# Altium PCB PCB1.PcbDoc
Units mm, origin at the board's own origin, x right, y up, seen from the top; angles counter-clockwise.
Board outline 270.23 x 180.4 mm, 2 copper layers (Top Layer, Bottom Layer); 167 components, 166 nets, 568 pads, 13 vias.
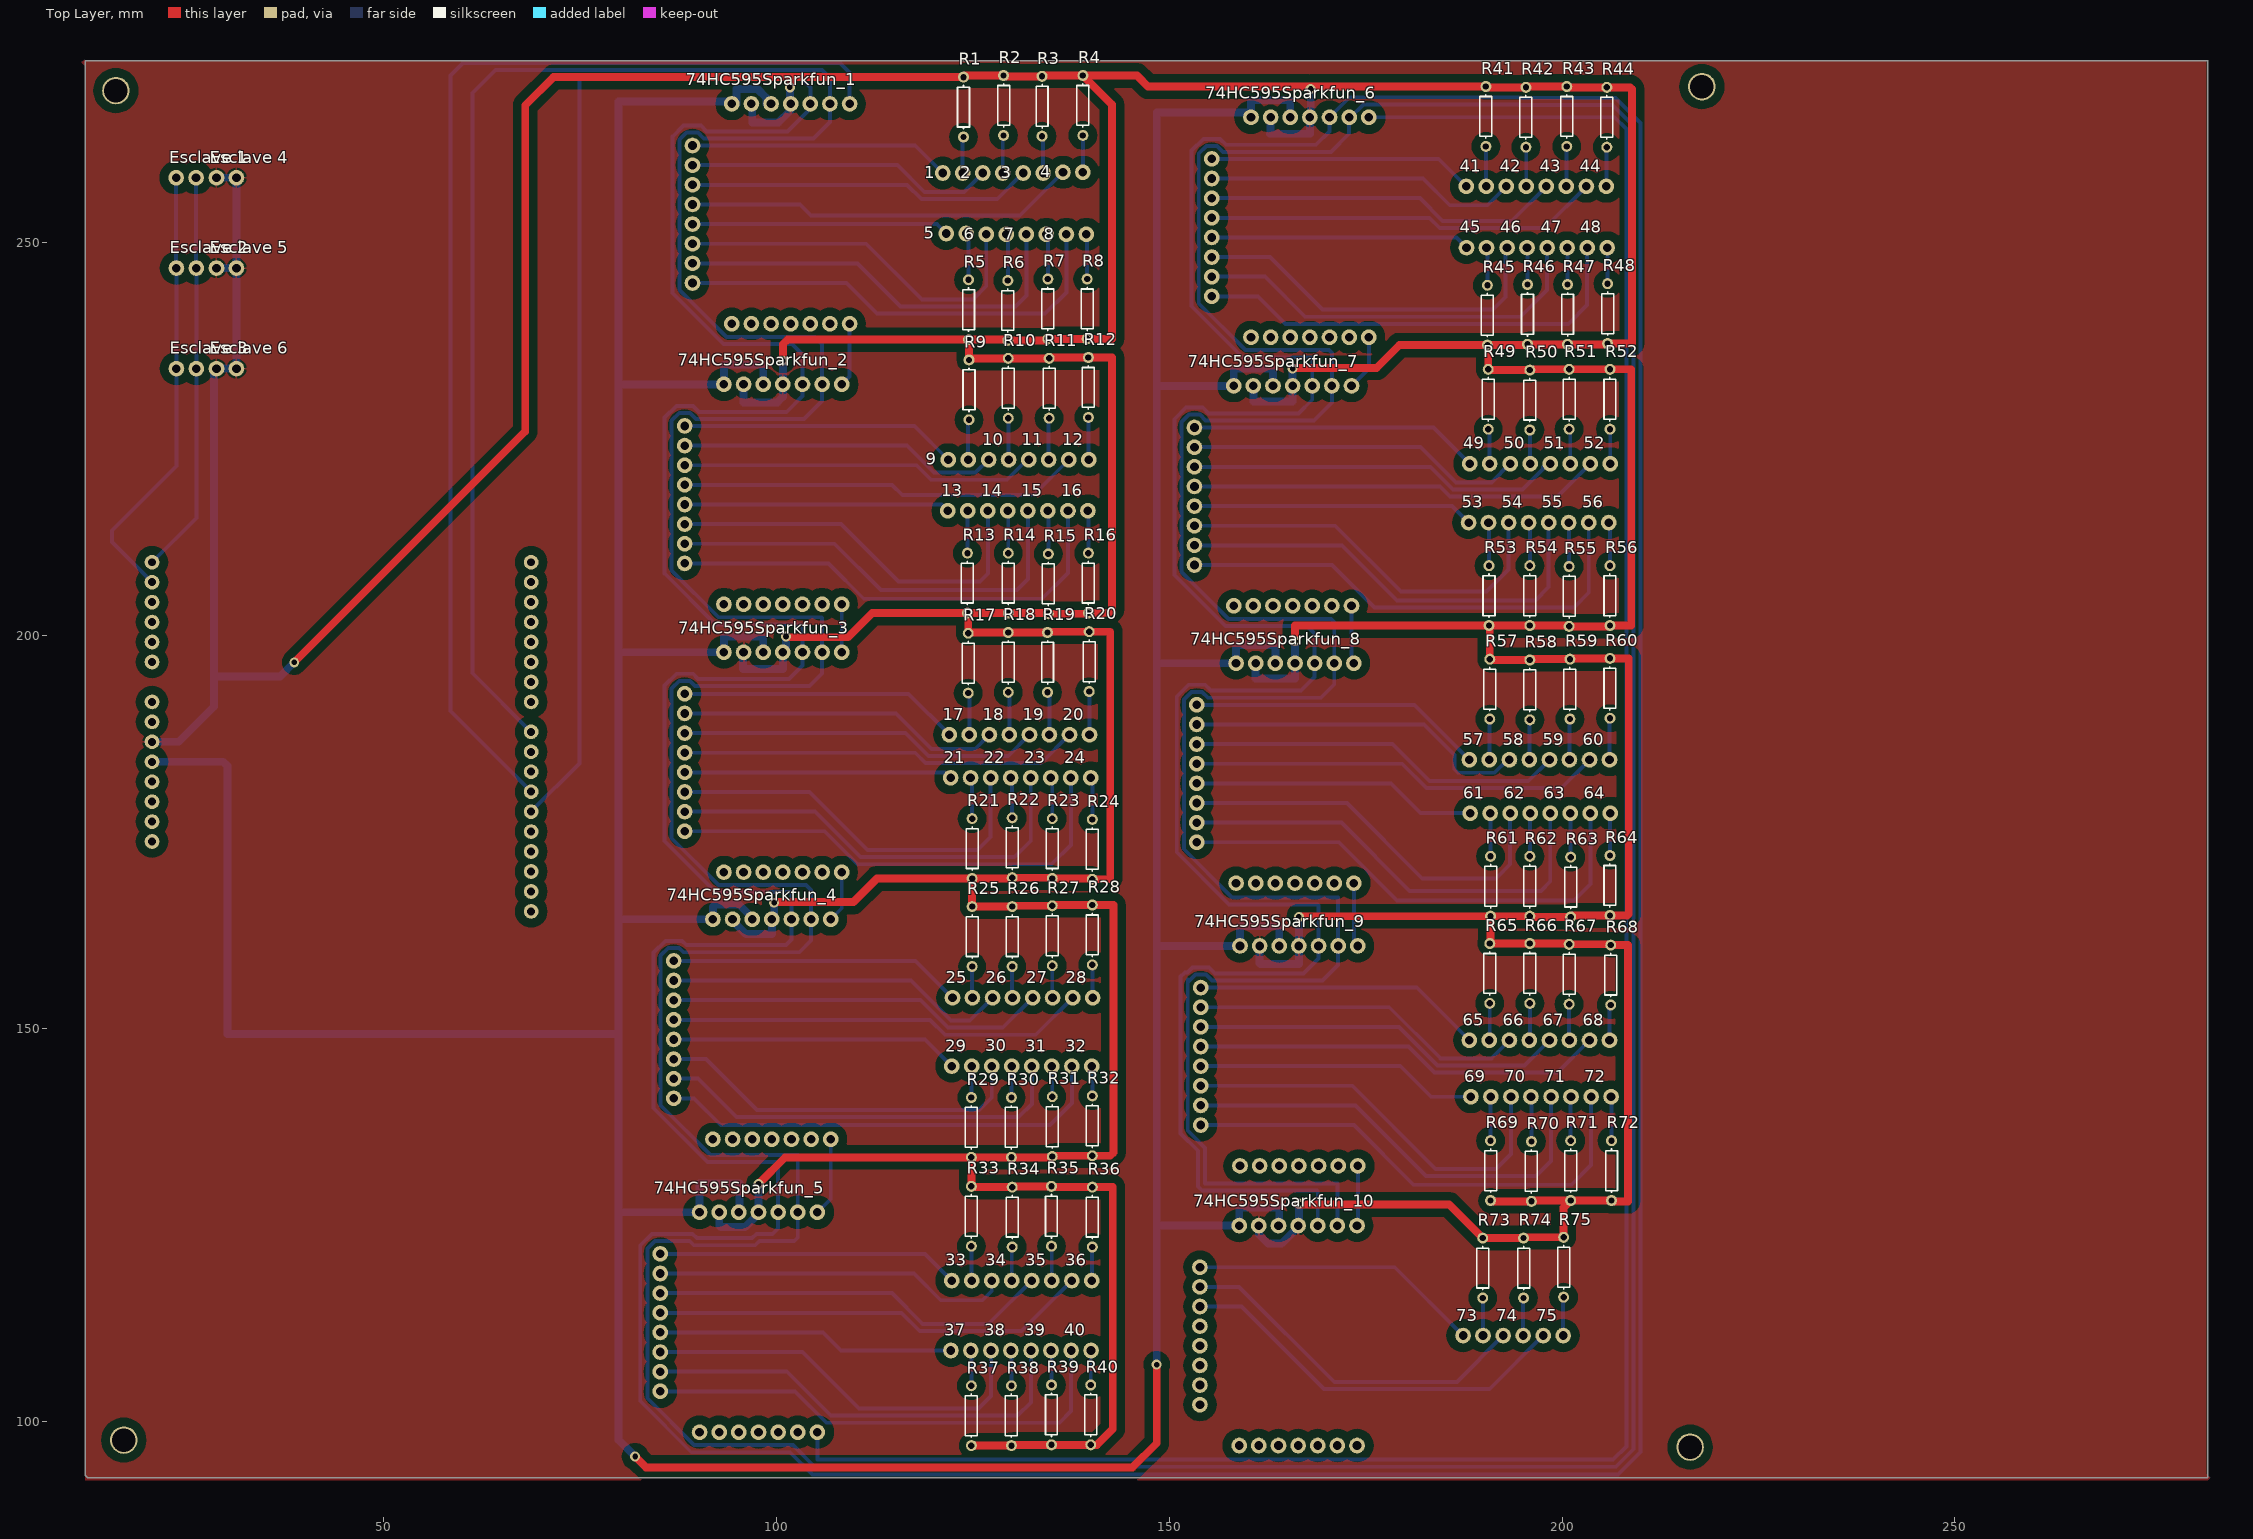
[diagram p0: Top Layer view]
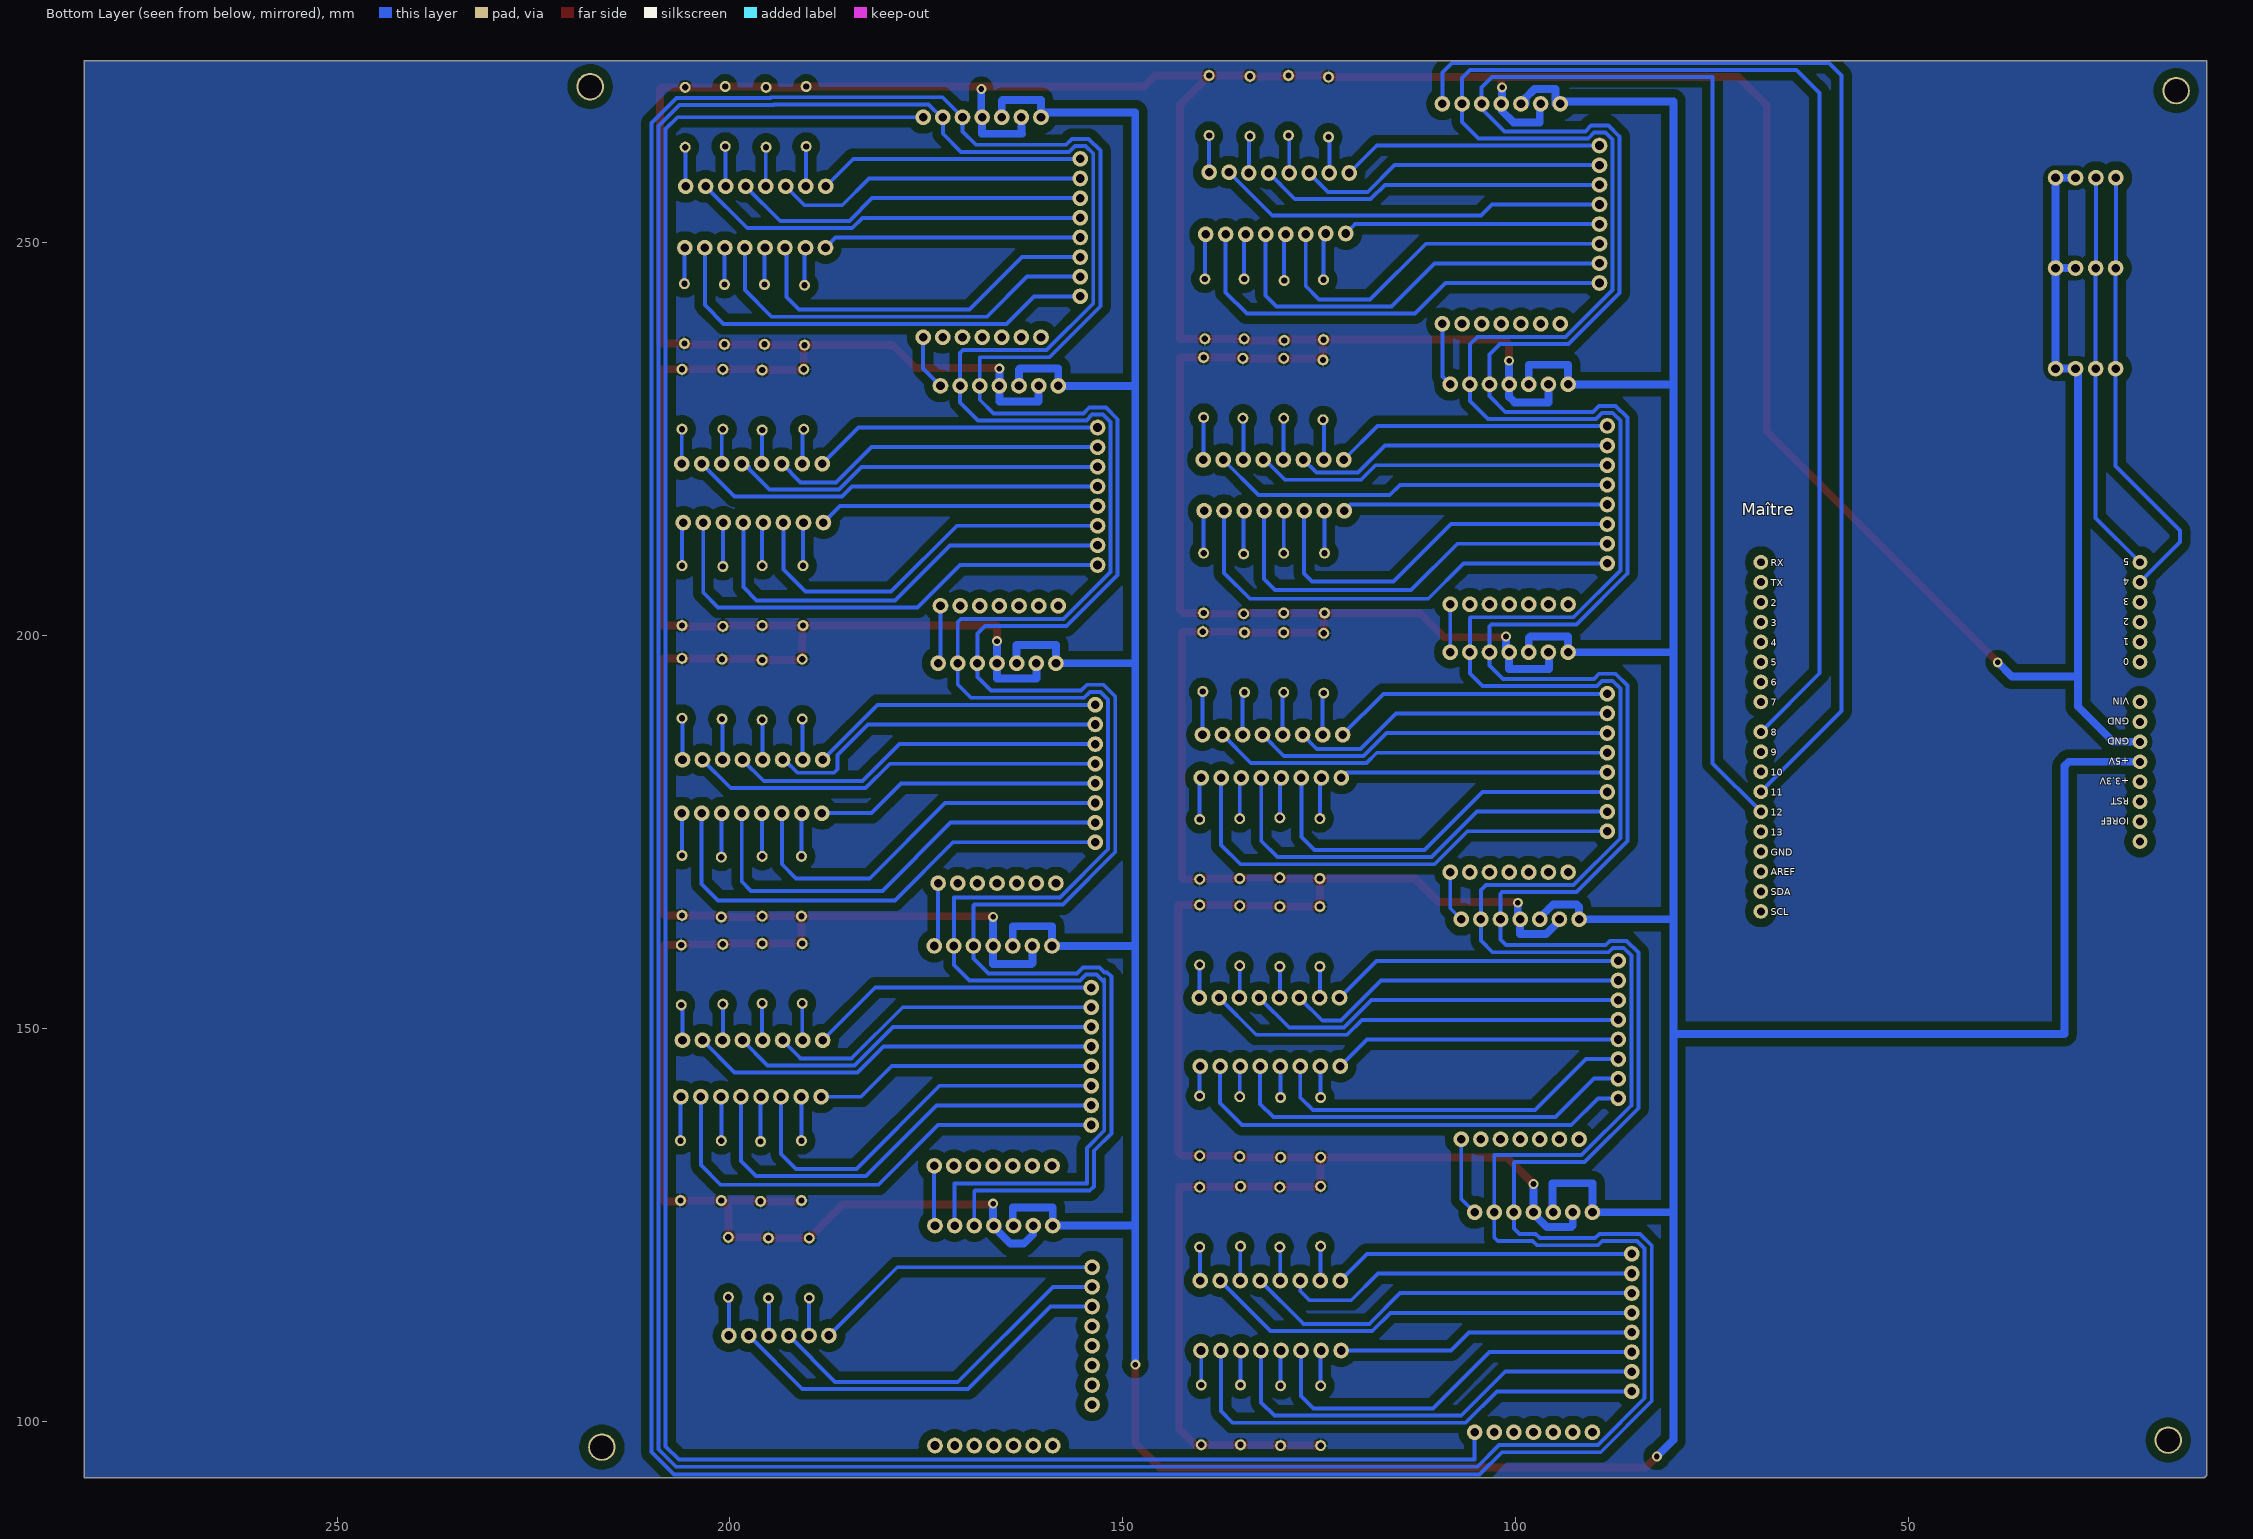
[diagram p1: Bottom Layer view, seen from below]

## Layer stack, top to bottom
Top Solder: solder mask 0.0102, Solder Resist, Dk 3.5
Top Layer: signal copper 0.0356
Dielectric 1: dielectric 0.32, FR-4, Dk 4.8
Bottom Layer: signal copper 0.0356
Bottom Solder: solder mask 0.0102, Solder Resist, Dk 3.5

## Board outline
12.3,92.8 12,93.1 12,273.2 282.2,273.2 282.233,273.167 282.233,92.8

## Design rules (kind name [scope] priority, off if disabled: settings)
Clearance Clearance_plan [(InPoly)] p1: gap=1.1
Clearance [All] p2: gap=0.6
PolygonConnect [All] p1: connectstyle=Relief reliefconductorwidth=0.254 reliefentries=4 polygonreliefangle="90 Angle" airgapwidth=0.254
RoutingVias [All] p1: holewidth=0.8 width=1.7 viastyle="Through Hole" minholewidth=0.8 minwidth=1.7 maxholewidth=0.8 maxwidth=1.7
SolderMaskExpansion [All] p1: expansion=0.102
Width Width_Puissance [(InNet('VCC') OR InNet ('GND'))] p1: maxlimit=2 minlimit=1 preferedwidth=1
Width [All] p2: maxlimit=0.5 minlimit=0.4 preferedwidth=0.5
30 further rules are at their usual default settings.

## Components (designator, comment, footprint, x,y, rotation, side; value= is the part's Value field where it differs from the comment)
1 "Embase_CI_2_contacts" Embase_CI_2_contacts 123.7,258.9 r90 top
2 "Embase_CI_2_contacts" Embase_CI_2_contacts 128.8,258.9 r90 top
3 "Embase_CI_2_contacts" Embase_CI_2_contacts 133.94,258.9 r90 top
4 "Embase_CI_2_contacts" Embase_CI_2_contacts 139,259 r90 top
5 "Embase_CI_2_contacts" Embase_CI_2_contacts 124.14,251.2 r90 top
6 "Embase_CI_2_contacts" Embase_CI_2_contacts 129.24,251.1 r90 top
7 "Embase_CI_2_contacts" Embase_CI_2_contacts 134.34,251.1 r90 top
8 "Embase_CI_2_contacts" Embase_CI_2_contacts 139.44,251.1 r90 top
9 "Embase_CI_2_contacts" Embase_CI_2_contacts 124.4,222.4 r90 top
10 "Embase_CI_2_contacts" Embase_CI_2_contacts 129.54,222.4 r90 top
11 "Embase_CI_2_contacts" Embase_CI_2_contacts 134.64,222.4 r90 top
12 "Embase_CI_2_contacts" Embase_CI_2_contacts 139.74,222.4 r90 top
13 "Embase_CI_2_contacts" Embase_CI_2_contacts 124.34,215.9 r90 top
14 "Embase_CI_2_contacts" Embase_CI_2_contacts 129.44,215.9 r90 top
15 "Embase_CI_2_contacts" Embase_CI_2_contacts 134.54,215.9 r90 top
16 "Embase_CI_2_contacts" Embase_CI_2_contacts 139.64,215.9 r90 top
17 "Embase_CI_2_contacts" Embase_CI_2_contacts 124.54,187.4 r90 top
18 "Embase_CI_2_contacts" Embase_CI_2_contacts 129.64,187.4 r90 top
19 "Embase_CI_2_contacts" Embase_CI_2_contacts 134.74,187.4 r90 top
20 "Embase_CI_2_contacts" Embase_CI_2_contacts 139.84,187.4 r90 top
21 "Embase_CI_2_contacts" Embase_CI_2_contacts 124.7,181.9 r90 top
22 "Embase_CI_2_contacts" Embase_CI_2_contacts 129.8,181.9 r90 top
23 "Embase_CI_2_contacts" Embase_CI_2_contacts 134.9,181.9 r90 top
24 "Embase_CI_2_contacts" Embase_CI_2_contacts 140,181.9 r90 top
25 "Embase_CI_2_contacts" Embase_CI_2_contacts 124.94,153.9 r90 top
26 "Embase_CI_2_contacts" Embase_CI_2_contacts 130.04,153.9 r90 top
27 "Embase_CI_2_contacts" Embase_CI_2_contacts 135.14,153.9 r90 top
28 "Embase_CI_2_contacts" Embase_CI_2_contacts 140.24,153.9 r90 top
29 "Embase_CI_2_contacts" Embase_CI_2_contacts 124.84,145.2 r90 top
30 "Embase_CI_2_contacts" Embase_CI_2_contacts 129.94,145.2 r90 top
31 "Embase_CI_2_contacts" Embase_CI_2_contacts 135.04,145.2 r90 top
32 "Embase_CI_2_contacts" Embase_CI_2_contacts 140.14,145.2 r90 top
33 "Embase_CI_2_contacts" Embase_CI_2_contacts 124.84,117.9 r90 top
34 "Embase_CI_2_contacts" Embase_CI_2_contacts 129.94,117.9 r90 top
35 "Embase_CI_2_contacts" Embase_CI_2_contacts 135.04,117.9 r90 top
36 "Embase_CI_2_contacts" Embase_CI_2_contacts 140.14,117.9 r90 top
37 "Embase_CI_2_contacts" Embase_CI_2_contacts 124.74,109 r90 top
38 "Embase_CI_2_contacts" Embase_CI_2_contacts 129.84,109 r90 top
39 "Embase_CI_2_contacts" Embase_CI_2_contacts 134.94,109 r90 top
40 "Embase_CI_2_contacts" Embase_CI_2_contacts 140.04,109 r90 top
41 "Embase_CI_2_contacts" Embase_CI_2_contacts 190.34,257.2 r90 top
42 "Embase_CI_2_contacts" Embase_CI_2_contacts 195.44,257.2 r90 top
43 "Embase_CI_2_contacts" Embase_CI_2_contacts 200.54,257.2 r90 top
44 "Embase_CI_2_contacts" Embase_CI_2_contacts 205.64,257.2 r90 top
45 "Embase_CI_2_contacts" Embase_CI_2_contacts 190.38,249.4 r90 top
46 "Embase_CI_2_contacts" Embase_CI_2_contacts 195.54,249.4 r90 top
47 "Embase_CI_2_contacts" Embase_CI_2_contacts 200.64,249.4 r90 top
48 "Embase_CI_2_contacts" Embase_CI_2_contacts 205.74,249.4 r90 top
49 "Embase_CI_2_contacts" Embase_CI_2_contacts 190.78,221.9 r90 top
50 "Embase_CI_2_contacts" Embase_CI_2_contacts 195.94,221.9 r90 top
51 "Embase_CI_2_contacts" Embase_CI_2_contacts 201.04,221.9 r90 top
52 "Embase_CI_2_contacts" Embase_CI_2_contacts 206.14,221.9 r90 top
53 "Embase_CI_2_contacts" Embase_CI_2_contacts 190.64,214.4 r90 top
54 "Embase_CI_2_contacts" Embase_CI_2_contacts 195.74,214.4 r90 top
55 "Embase_CI_2_contacts" Embase_CI_2_contacts 200.84,214.4 r90 top
56 "Embase_CI_2_contacts" Embase_CI_2_contacts 205.94,214.4 r90 top
57 "Embase_CI_2_contacts" Embase_CI_2_contacts 190.74,184.2 r90 top
58 "Embase_CI_2_contacts" Embase_CI_2_contacts 195.84,184.2 r90 top
59 "Embase_CI_2_contacts" Embase_CI_2_contacts 200.94,184.2 r90 top
60 "Embase_CI_2_contacts" Embase_CI_2_contacts 206.04,184.2 r90 top
61 "Embase_CI_2_contacts" Embase_CI_2_contacts 190.84,177.4 r90 top
62 "Embase_CI_2_contacts" Embase_CI_2_contacts 195.94,177.4 r90 top
63 "Embase_CI_2_contacts" Embase_CI_2_contacts 201.04,177.4 r90 top
64 "Embase_CI_2_contacts" Embase_CI_2_contacts 206.14,177.4 r90 top
65 "Embase_CI_2_contacts" Embase_CI_2_contacts 190.74,148.5 r90 top
66 "Embase_CI_2_contacts" Embase_CI_2_contacts 195.84,148.5 r90 top
67 "Embase_CI_2_contacts" Embase_CI_2_contacts 200.94,148.5 r90 top
68 "Embase_CI_2_contacts" Embase_CI_2_contacts 206.04,148.5 r90 top
69 "Embase_CI_2_contacts" Embase_CI_2_contacts 190.94,141.3 r90 top
70 "Embase_CI_2_contacts" Embase_CI_2_contacts 196.04,141.3 r90 top
71 "Embase_CI_2_contacts" Embase_CI_2_contacts 201.14,141.3 r90 top
72 "Embase_CI_2_contacts" Embase_CI_2_contacts 206.24,141.3 r90 top
73 "Embase_CI_2_contacts" Embase_CI_2_contacts 189.94,110.9 r90 top
74 "Embase_CI_2_contacts" Embase_CI_2_contacts 195.04,110.9 r90 top
74HC595Sparkfun_1 "74HC595" 74HC595 94.3,267.7 r270 top
74HC595Sparkfun_2 "74HC595" 74HC595 93.3,232 r270 top
74HC595Sparkfun_3 "74HC595" 74HC595 93.3,197.9 r270 top
74HC595Sparkfun_4 "74HC595" 74HC595 91.9,163.9 r270 top
74HC595Sparkfun_5 "74HC595" 74HC595 90.2,126.6 r270 top
74HC595Sparkfun_6 "74HC595" 74HC595 160.4,266 r270 top
74HC595Sparkfun_7 "74HC595" 74HC595 158.2,231.8 r270 top
74HC595Sparkfun_8 "74HC595" 74HC595 158.5,196.5 r270 top
74HC595Sparkfun_9 "74HC595" 74HC595 159,160.5 r270 top
74HC595Sparkfun_10 "74HC595" 74HC595 158.9,124.9 r270 top
75 "Embase_CI_2_contacts" Embase_CI_2_contacts 200.14,110.9 r90 top
"Esclave 1" "Embase_CI_2_contacts" Embase_CI_2_contacts 26.1,258.3 r90 top
"Esclave 2" "Embase_CI_2_contacts" Embase_CI_2_contacts 26.14,246.8 r90 top
"Esclave 3" "Embase_CI_2_contacts" Embase_CI_2_contacts 26.14,234 r90 top
"Esclave 4" "Embase_CI_2_contacts" Embase_CI_2_contacts 31.24,258.3 r90 top
"Esclave 5" "Embase_CI_2_contacts" Embase_CI_2_contacts 31.24,246.8 r90 top
"Esclave 6" "Embase_CI_2_contacts" Embase_CI_2_contacts 31.24,234 r90 top
Maître "Arduino" UNO_R3_SHIELD 71.3,154.74 r180 bottom
R1 "Res1" AXIAL-0.3 123.8,267.3 r270 top
R2 "Res1" AXIAL-0.3 128.9,267.5 r270 top
R3 "Res1" AXIAL-0.3 133.8,267.4 r270 top
R4 "Res1" AXIAL-0.3 139,267.5 r270 top
R5 "Res1" AXIAL-0.3 124.44,241.5 r90 top
R6 "Res1" AXIAL-0.3 129.44,241.4 r90 top
R7 "Res1" AXIAL-0.3 134.54,241.6 r90 top
R8 "Res1" AXIAL-0.3 139.54,241.6 r90 top
R9 "Res1" AXIAL-0.3 124.5,231.3 r270 top
R10 "Res1" AXIAL-0.3 129.5,231.5 r270 top
R11 "Res1" AXIAL-0.3 134.7,231.5 r270 top
R12 "Res1" AXIAL-0.3 139.7,231.6 r270 top
R13 "Res1" AXIAL-0.3 124.3,206.7 r90 top
R14 "Res1" AXIAL-0.3 129.5,206.7 r90 top
R15 "Res1" AXIAL-0.3 134.6,206.6 r90 top
R16 "Res1" AXIAL-0.3 139.7,206.7 r90 top
R17 "Res1" AXIAL-0.3 124.4,196.5 r270 top
R18 "Res1" AXIAL-0.3 129.5,196.6 r270 top
R19 "Res1" AXIAL-0.3 134.5,196.6 r270 top
R20 "Res1" AXIAL-0.3 139.8,196.7 r270 top
R21 "Res1" AXIAL-0.3 124.9,172.9 r90 top
R22 "Res1" AXIAL-0.3 130,173 r90 top
R23 "Res1" AXIAL-0.3 135.1,172.9 r90 top
R24 "Res1" AXIAL-0.3 140.2,172.8 r90 top
R25 "Res1" AXIAL-0.3 124.9,161.7 r270 top
R26 "Res1" AXIAL-0.3 130,161.7 r270 top
R27 "Res1" AXIAL-0.3 135.1,161.8 r270 top
R28 "Res1" AXIAL-0.3 140.2,161.9 r270 top
R29 "Res1" AXIAL-0.3 124.8,137.4 r90 top
R30 "Res1" AXIAL-0.3 129.9,137.4 r90 top
R31 "Res1" AXIAL-0.3 135.1,137.5 r90 top
R32 "Res1" AXIAL-0.3 140.2,137.6 r90 top
R33 "Res1" AXIAL-0.3 124.8,126.09 r270 top
R34 "Res1" AXIAL-0.3 130,125.99 r270 top
R35 "Res1" AXIAL-0.3 135,126.09 r270 top
R36 "Res1" AXIAL-0.3 140.2,125.99 r270 top
R37 "Res1" AXIAL-0.3 124.8,100.7 r90 top
R38 "Res1" AXIAL-0.3 129.9,100.7 r90 top
R39 "Res1" AXIAL-0.3 135,100.8 r90 top
R40 "Res1" AXIAL-0.3 140,100.8 r90 top
R41 "Res1" AXIAL-0.3 190.3,266.1 r270 top
R42 "Res1" AXIAL-0.3 195.4,266 r270 top
R43 "Res1" AXIAL-0.3 200.6,266.1 r270 top
R44 "Res1" AXIAL-0.3 205.7,266 r270 top
R45 "Res1" AXIAL-0.3 190.5,240.8 r90 top
R46 "Res1" AXIAL-0.3 195.6,240.9 r90 top
R47 "Res1" AXIAL-0.3 200.7,240.9 r90 top
R48 "Res1" AXIAL-0.3 205.8,241 r90 top
R49 "Res1" AXIAL-0.3 190.6,230.1 r270 top
R50 "Res1" AXIAL-0.3 195.9,230 r270 top
R51 "Res1" AXIAL-0.3 200.9,230.1 r270 top
R52 "Res1" AXIAL-0.3 206.1,230.1 r270 top
R53 "Res1" AXIAL-0.3 190.7,205.1 r90 top
R54 "Res1" AXIAL-0.3 195.9,205.1 r90 top
R55 "Res1" AXIAL-0.3 200.9,205 r90 top
R56 "Res1" AXIAL-0.3 206.1,205.1 r90 top
R57 "Res1" AXIAL-0.3 190.8,193.2 r270 top
R58 "Res1" AXIAL-0.3 195.9,193.1 r270 top
R59 "Res1" AXIAL-0.3 201,193.2 r270 top
R60 "Res1" AXIAL-0.3 206.1,193.3 r270 top
R61 "Res1" AXIAL-0.3 190.9,168.1 r90 top
R62 "Res1" AXIAL-0.3 195.9,168.1 r90 top
R63 "Res1" AXIAL-0.3 201.1,168 r90 top
R64 "Res1" AXIAL-0.3 206.1,168.2 r90 top
R65 "Res1" AXIAL-0.3 190.8,157 r270 top
R66 "Res1" AXIAL-0.3 195.9,157 r270 top
R67 "Res1" AXIAL-0.3 200.9,156.9 r270 top
R68 "Res1" AXIAL-0.3 206.2,156.8 r270 top
R69 "Res1" AXIAL-0.3 190.9,131.9 r90 top
R70 "Res1" AXIAL-0.3 196.1,131.8 r90 top
R71 "Res1" AXIAL-0.3 201.1,131.9 r90 top
R72 "Res1" AXIAL-0.3 206.3,131.9 r90 top
R73 "Res1" AXIAL-0.3 189.9,119.5 r270 top
R74 "Res1" AXIAL-0.3 195.1,119.5 r270 top
R75 "Res1" AXIAL-0.3 200.2,119.6 r270 top

## Footprints (in the part's own frame and the unit in brackets; to place one, negate y for a bottom-side part, rotate by r counter-clockwise, add the part's x,y. Pads: shape width x height; smd on the part's side, far side on the other; paste and mask are expansions set on the pad)
74HC595 [mm]
  round 2 hole 1.1: 1(0,0) 2(0,2.5) 3(0,5) 4(0,7.5) 5(0,10) 6(0,12.5) 7(0,15) 8(28,0) 9(28,2.5) 10(28,5) 11(28,7.5) 12(28,10) 13(28,12.5) 14(28,15) 15(5.3,-5) 16(7.8,-5) 17(10.3,-5) 18(12.8,-5) 19(15.3,-5) 20(17.8,-5) 21(20.3,-5) 22(22.8,-5)
AXIAL-0.3 [mm] "Axial Device, Thru-Hole; 2 Leads; 0.3 in Pin Spacing"
  round 1.4 hole 0.8: 1(-3.81,0) 2(3.81,0)
  silkscreen extent -2.77,-0.76 2.77,0.76
Embase_CI_2_contacts [mm]
  round 2 hole 1.1: 1(0,0) 2(0,2.54)
UNO_R3_SHIELD [mil]
  round 74 hole 40: 3.3V(2000,1050) 5V(2000,1150) A0(2000,1650) A1(2000,1750) A2(2000,1850) A3(2000,1950) A4(2000,2050) A5(2000,2150) AREF(100,600) D2(100,1950) D3(100,1850) D4(100,1750) D5(100,1650) D6(100,1550) D7(100,1450) D8(100,1300) D9(100,1200) D10(100,1100) D11(100,1000) D12(100,900) D13(100,800) GND@0(2000,1250) GND@1(2000,1350) GND@2(100,700) IOREF(2000,850) NC(2000,750) RES(2000,950) RX(100,2150) SCL(100,400) SDA(100,500) TX(100,2050) VIN(2000,1450)

## Part data
Maître: library part ARDUINO_R3_SHIELD
R1 R2 R3 R4 R5 R6 R7 R8 R9 R10 R11 R12 R13 R14 R15 R16 R17 R18 R19 R20 R21 R22 R23 R24 R25 R26 R27 R28 R29 R30 R31 R32 R33 R34 R35 R36 R37 R38 R39 R40 R41 R42 R43 R44 R45 R46 R47 R48 R49 R50 R51 R52 R53 R54 R55 R56 R57 R58 R59 R60 R61 R62 R63 R64 R65 R66 R67 R68 R69 R70 R71 R72 R73 R74 R75: "Resistor"

## Free pads (board coordinates)
  round 3.5 hole 3: 3(15.9,269.4) 4(16.9,97.6) 5(216.3,96.7) 6(217.8,269.9)

## Via types
v1: diameter 1.27, hole 0.711, Top Layer to Bottom Layer, 13 vias

## Nets (pads, with @x,y where several pads share a name; then routed paths per layer and width w, separated by ;. In a path a pad name is that pad's centre, name@x,y a point inside that pad or via, vN(x,y) a via of type N, cw(c..) or ccw(c..) an arc to the next point about the centre after c; other vN are vias at no path point)
GND: 74HC595Sparkfun_1.2 74HC595Sparkfun_1.4 74HC595Sparkfun_2.2 74HC595Sparkfun_2.4 74HC595Sparkfun_3.2 74HC595Sparkfun_3.4 74HC595Sparkfun_4.2 74HC595Sparkfun_4.4 74HC595Sparkfun_5.2 74HC595Sparkfun_5.4 74HC595Sparkfun_6.2 74HC595Sparkfun_6.4 74HC595Sparkfun_7.2 74HC595Sparkfun_7.4 74HC595Sparkfun_8.2 74HC595Sparkfun_8.4 74HC595Sparkfun_9.2 74HC595Sparkfun_9.4 74HC595Sparkfun_10.2 74HC595Sparkfun_10.4 "Esclave 4.1" "Esclave 4.2" "Esclave 5.1" "Esclave 5.2" "Esclave 6.1" "Esclave 6.2" Maître.GND@0 R1.1 R2.1 R3.1 R4.1 R5.1 R6.1 R7.1 R8.1 R9.1 R10.1 R11.1 R12.1 R13.1 R14.1 R15.1 R16.1 R17.1 R18.1 R19.1 R20.1 R21.1 R22.1 R23.1 R24.1 R25.1 R26.1 R27.1 R28.1 R29.1 R30.1 R31.1 R32.1 R33.1 R34.1 R35.1 R36.1 R37.1 R38.1 R39.1 R40.1 R41.1 R42.1 R43.1 R44.1 R45.1 R46.1 R47.1 R48.1 R49.1 R50.1 R51.1 R52.1 R53.1 R54.1 R55.1 R56.1 R57.1 R58.1 R59.1 R60.1 R61.1 R62.1 R63.1 R64.1 R65.1 R66.1 R67.1 R68.1 R69.1 R70.1 R71.1 R72.1 R73.1 R74.1 R75.1 | length 1269.2
  Top Layer w1: v1(38.6,196.6) 68.01,226.01 68.01,267.52 71.6,271.11 101.8,271.11 ; 74HC595Sparkfun_5.2@92.4,126.3 74HC595Sparkfun_5.2 ; 74HC595Sparkfun_2.2 74HC595Sparkfun_2.2@96,231.8 ; 74HC595Sparkfun_5.4 74HC595Sparkfun_5.4@97.7,126.787 ; v1(97.7,130.2) 101.09,133.59 R29.1 ; 74HC595Sparkfun_4.4 74HC595Sparkfun_4.4@99.4,164.087 ; v1(99.7,166) 99.8,166.1 109.8,166.1 112.79,169.09 R21.1 ; v1(100.8,235) 100.8,237.1 101.39,237.69 R5.1 ; v1(101.2,199.9) 101.3,199.8 109.1,199.8 112.19,202.89 R13.1 ; v1(101.7,269.8) 101.8,269.9 101.8,271.11 ; R37.1 R38.1 130,96.99 R39.1 R40.1 140.79,96.99 142.8,99 142.8,129.8 R36.1 135.1,129.8 R35.1 130.1,129.9 R34.1 124.9,129.8 R33.1 R29.1 ; 74HC595Sparkfun_7.2@160.6,231.7 74HC595Sparkfun_7.2 ; 74HC595Sparkfun_8.2@160.8,196.3 74HC595Sparkfun_8.2 ; 74HC595Sparkfun_6.2@162.6,265.7 74HC595Sparkfun_6.2 ; v1(166,199.3) 166,201.29 R53.1 ; v1@166.1,234.1 176.4,234.1 179.29,236.99 R45.1 ; v1@166.4,127.6 185.61,127.6 R73.1 R74.1 195.2,123.41 R75.1 200.2,127.19 R71.1 ; v1@166.5,164.29 R61.1 ; v1(168,269.6) 167.7,269.9 147.3,269.9 145.89,271.31 R4.1 ; v1@168,269.91 R41.1 190.4,269.81 R42.1 195.5,269.91 R43.1 200.7,269.81 R44.1 208.69,269.81 208.89,269.61 208.89,237.19 R48.1 205.7,237.09 R47.1 R46.1 195.5,236.99 R45.1 ; R69.1 191,127.99 R70.1 196.2,128.09 R71.1 ; 101.8,271.11 R1.1 124,271.31 R2.1 129,271.21 R3.1 133.9,271.31 R4.1 ; R13.1 124.4,202.79 R17.1 124.5,200.41 R18.1 R19.1 134.6,200.51 R20.1 142.49,200.51 142.49,169.19 142.29,168.99 R24.1 140.1,169.09 R23.1 135,169.19 R22.1 129.9,169.09 R21.1 ; R13.1 R14.1 134.5,202.89 R15.1 139.6,202.79 R16.1 142.29,202.89 142.69,203.29 142.69,235.41 R12.1 134.8,235.41 R11.1 R10.1 124.7,235.31 R9.1 124.5,237.63 R5.1 ; R5.1 129.34,237.69 R6.1 134.34,237.59 R7.1 R8.1 142.69,237.79 142.69,267.62 R4.1 ; R29.1 R30.1 135,133.59 R31.1 135.2,133.79 R32.1 142.49,133.79 142.89,134.19 142.89,165.71 R28.1 135.2,165.71 R27.1 130.1,165.61 R26.1 R25.1 R21.1 ; R45.1 190.6,236.89 R49.1 190.7,233.81 R50.1 196,233.91 R51.1 R52.1 208.81,233.91 208.81,201.31 208.79,201.29 R56.1 206,201.19 R55.1 200.8,201.29 R54.1 R53.1 ; R53.1 190.8,201.19 R57.1 190.9,196.91 R58.1 196,197.01 R59.1 201.1,197.11 R60.1 208.49,197.11 208.49,164.59 208.29,164.39 R64.1 201.3,164.39 R63.1 196,164.19 R62.1 R61.1 ; R61.1 190.9,160.91 R65.1 R66.1 200.8,160.81 R67.1 206.1,160.71 R68.1 208.39,160.61 208.39,127.99 206.4,127.99 R72.1 R71.1
  Bottom Layer w1: 20.5,186.49 23.89,186.49 28.4,191 28.4,194.8 ; 28.4,234 28.4,194.8 ; 28.7,234 31.24,234 31.24,246.8 ; 28.7,246.8 31.24,246.8 ; 28.7,258.3 31.24,258.3 31.24,246.8 ; v1(38.6,196.6) 36.8,194.8 28.4,194.8 ; 74HC595Sparkfun_5.2 92.7,124.9 92.9,124.7 95.987,124.7 97.7,126.413 74HC595Sparkfun_5.4 v1(97.7,130.2) ; 74HC595Sparkfun_4.2 94.4,163.713 96.113,162 99.4,162 74HC595Sparkfun_4.4 99.7,164.2 v1(99.7,166) ; 74HC595Sparkfun_3.2 95.75,197.85 95.75,195.75 100.8,195.75 74HC595Sparkfun_3.4 101.2,198.3 v1(101.2,199.9) ; 74HC595Sparkfun_2.2 95.8,229.7 100.1,229.7 100.8,230.4 74HC595Sparkfun_2.4 v1(100.8,235) ; 74HC595Sparkfun_1.2 96.9,267.6 96.9,265.35 100.25,265.35 101.8,266.9 74HC595Sparkfun_1.4 101.7,267.8 v1(101.7,269.8) ; 74HC595Sparkfun_7.2 160.7,229.8 165.7,229.8 74HC595Sparkfun_7.4 v1(165.7,234) ; 74HC595Sparkfun_8.2 160.968,196.468 160.968,194.532 166,194.532 74HC595Sparkfun_8.4 v1(166,199.3) ; 74HC595Sparkfun_10.2 161.4,123.8 162.6,122.6 164.287,122.6 166.4,124.713 74HC595Sparkfun_10.4 166.5,125 v1(166.5,127.7) ; 74HC595Sparkfun_9.2 161.5,158.3 161.6,158.2 166.5,158.2 74HC595Sparkfun_9.4 v1(166.5,164.2) ; 74HC595Sparkfun_6.2 162.9,264 162.8,263.9 167.9,263.9 74HC595Sparkfun_6.4 168,266.1 v1(168,269.6) ; R41.1 R41.1@190.4,269.81 ; R42.1 R42.1@195.5,269.91 ; R43.1 R43.1@200.7,269.81
Net1_1: 1.1 R1.2 | length 4.6
  Top Layer w0.5: R1.2@123.7,263.39 R1.2
  Bottom Layer w0.5: 1.1 R1.2@123.7,263.39
Net1_2: 1.2 74HC595Sparkfun_1.15 | length 33.3
  Bottom Layer w0.5: 74HC595Sparkfun_1.15 117.66,262.4 1.2
Net2_1: 2.1 R2.2 | length 4.8
  Top Layer w0.5: R2.2@128.8,263.59 R2.2
  Bottom Layer w0.5: 2.1 R2.2@128.8,263.59
Net2_2: 2.2 74HC595Sparkfun_1.16 | length 39.4
  Bottom Layer w0.5: 74HC595Sparkfun_1.16 115.4,259.9 118.8,256.5 123.86,256.5 2.2
Net3_1: 3.1 R3.2 | length 4.7
  Top Layer w0.5: R3.2 R3.2@133.94,263.45
  Bottom Layer w0.5: 3.1 R3.2@133.94,263.45
Net3_2: 3.2 74HC595Sparkfun_1.17 | length 44.2
  Bottom Layer w0.5: 74HC595Sparkfun_1.17 116.627,257.4 118.427,255.6 128.1,255.6 3.2
Net4_1: 4.1 R4.2 | length 4.7
  Bottom Layer w0.5: 4.1 R4.2
Net4_2: 4.2 74HC595Sparkfun_1.18 | length 50
  Bottom Layer w0.5: 74HC595Sparkfun_1.18 103,254.9 104.4,253.5 130.96,253.5 4.2
Net5_1: 5.1 R5.2 | length 6
  Top Layer w0.5: 5.1 5.1@124.44,250.9
  Bottom Layer w0.5: R5.2 5.1@124.44,250.9
Net5_2: 5.2 74HC595Sparkfun_1.19 | length 32.8
  Bottom Layer w0.5: 74HC595Sparkfun_1.19 120.4,252.4 5.2
Net6_1: 6.1 R6.2 | length 6
  Top Layer w0.5: 6.1 6.1@129.44,250.9
  Bottom Layer w0.5: R6.2 6.1@129.44,250.9
Net6_2: 6.2 74HC595Sparkfun_1.20 | length 47.6
  Bottom Layer w0.5: 74HC595Sparkfun_1.20 111.4,249.9 118.5,242.8 125,242.8 126.7,244.5 6.2
Net7_1: 7.1 R7.2 | length 5.8
  Top Layer w0.5: 7.1 7.1@134.54,250.9
  Bottom Layer w0.5: R7.2 7.1@134.54,250.9
Net7_2: 7.2 74HC595Sparkfun_1.21 | length 53.2
  Bottom Layer w0.5: 74HC595Sparkfun_1.21 110.3,247.4 115.8,241.9 130.4,241.9 131.8,243.3 7.2
Net8_1: 8.1 R8.2 | length 5.7
  Top Layer w0.5: 8.1 8.1@139.54,251
  Bottom Layer w0.5: R8.2 8.1@139.54,251
Net8_2: 8.2 74HC595Sparkfun_1.22 | length 57.7
  Bottom Layer w0.5: 74HC595Sparkfun_1.22 108.9,244.9 112.8,241 134.2,241 136.9,243.7 8.2
Net9_1: 9.1 R9.2 | length 5.1
  Top Layer w0.5: R9.2@124.4,227.39 R9.2
  Bottom Layer w0.5: 9.1 R9.2@124.4,227.39
Net9_2: 9.2 74HC595Sparkfun_2.15 | length 35.3
  Bottom Layer w0.5: 74HC595Sparkfun_2.15 117.56,226.7 9.2
Net10_1: 10.1 R10.2 | length 5.3
  Top Layer w0.5: R10.2 R10.2@129.54,227.65
  Bottom Layer w0.5: 10.1 R10.2@129.54,227.65
Net10_2: 10.2 74HC595Sparkfun_2.16 | length 40.8
  Bottom Layer w0.5: 74HC595Sparkfun_2.16 116.6,224.2 120.05,220.75 125.35,220.75 10.2
Net11_1: 11.1 R11.2 | length 5.3
  Top Layer w0.5: R11.2@134.64,227.63 R11.2
  Bottom Layer w0.5: 11.1 R11.2@134.64,227.63
Net11_2: 11.2 74HC595Sparkfun_2.17 | length 45.6
  Bottom Layer w0.5: 74HC595Sparkfun_2.17 117.827,221.7 119.677,219.85 129.323,219.85 131.873,222.4 11.2
Net12_1: 12.1 R12.2 | length 5.4
  Top Layer w0.5: R12.2 R12.2@139.74,227.75
  Bottom Layer w0.5: 12.1 R12.2@139.74,227.75
Net12_2: 12.2 74HC595Sparkfun_2.18 | length 51.3
  Bottom Layer w0.5: 74HC595Sparkfun_2.18 114.7,219.2 116,217.9 132.7,217.9 12.2
Net13_1: 13.1 R13.2 | length 5.4
  Top Layer w0.5: 13.1@124.3,215.86 13.1
  Bottom Layer w0.5: R13.2 13.1@124.3,215.86
Net13_2: 13.2 74HC595Sparkfun_2.19 | length 33.8
  Bottom Layer w0.5: 74HC595Sparkfun_2.19 121,216.7 13.2
Net14_1: 14.1 R14.2 | length 5.4
  Top Layer w0.5: 14.1 14.1@129.5,215.84
  Bottom Layer w0.5: R14.2 14.1@129.5,215.84
Net14_2: 14.2 74HC595Sparkfun_2.20 | length 50
  Bottom Layer w0.5: 74HC595Sparkfun_2.20 108.2,214.2 115.5,206.9 125.9,206.9 126.9,207.9 14.2
Net15_1: 15.1 R15.2 | length 5.5
  Top Layer w0.5: 15.1 15.1@134.6,215.84
  Bottom Layer w0.5: R15.2 15.1@134.6,215.84
Net15_2: 15.2 74HC595Sparkfun_2.21 | length 55.4
  Bottom Layer w0.5: 74HC595Sparkfun_2.21 107.4,211.7 113.3,205.8 130.6,205.8 132,207.2 15.2
Net16_1: 16.1 R16.2 | length 5.4
  Top Layer w0.5: 16.1 16.1@139.7,215.84
  Bottom Layer w0.5: R16.2 16.1@139.7,215.84
Net16_2: 16.2 74HC595Sparkfun_2.22 | length 59.9
  Bottom Layer w0.5: 74HC595Sparkfun_2.22 106.6,209.2 111.1,204.7 133.8,204.7 137.1,208 16.2
Net17_1: 17.1 R17.2 | length 5.3
  Top Layer w0.5: R17.2 R17.2@124.54,192.55
  Bottom Layer w0.5: 17.1 R17.2@124.54,192.55
Net17_2: 17.2 74HC595Sparkfun_3.15 | length 35.9
  Bottom Layer w0.5: 74HC595Sparkfun_3.15 116.8,192.6 17.2
Net18_1: 18.1 R18.2 | length 5.4
  Top Layer w0.5: R18.2 R18.2@129.64,192.65
  Bottom Layer w0.5: 18.1 R18.2@129.64,192.65
Net18_2: 18.2 74HC595Sparkfun_3.16 | length 41.4
  Bottom Layer w0.5: 74HC595Sparkfun_3.16 115.2,190.1 119.7,185.6 125.3,185.6 18.2
Net19_1: 19.1 R19.2 | length 5.5
  Top Layer w0.5: R19.2 R19.2@134.74,192.55
  Bottom Layer w0.5: 19.1 R19.2@134.74,192.55
Net19_2: 19.2 74HC595Sparkfun_3.17 | length 46.2
  Bottom Layer w0.5: 74HC595Sparkfun_3.17 116.427,187.6 119.327,184.7 129.5,184.7 19.2
Net20_1: 20.1 R20.2 | length 5.5
  Top Layer w0.5: R20.2@139.6,192.79 R20.2@139.84,192.55
  Bottom Layer w0.5: 20.1 R20.2@139.84,192.55
Net20_2: 20.2 74HC595Sparkfun_3.18 | length 51
  Bottom Layer w0.5: 74HC595Sparkfun_3.18 117.654,185.1 118.954,183.8 133.7,183.8 20.2
Net21_1: 21.1 R21.2 | length 5.3
  Top Layer w0.5: 21.1 21.1@124.9,181.7
  Bottom Layer w0.5: R21.2 21.1@124.9,181.7
Net21_2: 21.2 74HC595Sparkfun_3.19 | length 34.1
  Bottom Layer w0.5: 74HC595Sparkfun_3.19 121.46,182.6 21.2
Net22_1: 22.1 R22.2 | length 5.2
  Top Layer w0.5: 22.1 22.1@130,181.7
  Bottom Layer w0.5: R22.2 22.1@130,181.7
Net22_2: 22.2 74HC595Sparkfun_3.20 | length 50.3
  Bottom Layer w0.5: 74HC595Sparkfun_3.20 104.2,180.1 111.6,172.7 125.6,172.7 127.26,174.36 22.2
Net23_1: 23.1 R23.2 | length 5.3
  Top Layer w0.5: 23.1 23.1@135.1,181.7
  Bottom Layer w0.5: R23.2 23.1@135.1,181.7
Net23_2: 23.2 74HC595Sparkfun_3.21 | length 55.4
  Bottom Layer w0.5: 74HC595Sparkfun_3.21 104.873,177.6 110.673,171.8 130.3,171.8 132.36,173.86 23.2
Net24_1: 24.1 R24.2 | length 5.4
  Top Layer w0.5: 24.1 24.1@140.2,181.7
  Bottom Layer w0.5: R24.2 24.1@140.2,181.7
Net24_2: 24.2 74HC595Sparkfun_3.22 | length 60.5
  Bottom Layer w0.5: 74HC595Sparkfun_3.22 106.1,175.1 110.3,170.9 135,170.9 137.46,173.36 24.2
Net25_1: 25.1 R25.2 | length 4
  Bottom Layer w0.5: R25.2 124.9,153.94 25.1
Net25_2: 25.2 74HC595Sparkfun_4.15 | length 37.4
  Bottom Layer w0.5: 74HC595Sparkfun_4.15 117.7,158.6 25.2
Net26_1: 26.1 R26.2 | length 4
  Bottom Layer w0.5: R26.2 130,153.94 26.1
Net26_2: 26.2 74HC595Sparkfun_4.16 | length 43.9
  Bottom Layer w0.5: 74HC595Sparkfun_4.16 117.1,156.1 122.2,151 124.6,151 26.2
Net27_1: 27.1 R27.2 | length 4.1
  Bottom Layer w0.5: R27.2 135.1,153.94 27.1
Net27_2: 27.2 74HC595Sparkfun_4.17 | length 48.7
  Bottom Layer w0.5: 74HC595Sparkfun_4.17 118.327,153.6 121.827,150.1 128.8,150.1 27.2
Net28_1: 28.1 R28.2 | length 4.2
  Bottom Layer w0.5: R28.2 140.2,153.94 28.1
Net28_2: 28.2 74HC595Sparkfun_4.18 | length 53.5
  Bottom Layer w0.5: 74HC595Sparkfun_4.18 119.554,151.1 121.454,149.2 133,149.2 28.2
Net29_1: 29.1 R29.2 | length 4
  Bottom Layer w0.5: R29.2 124.8,145.16 29.1
Net29_2: 29.2 74HC595Sparkfun_4.19 | length 36.8
  Bottom Layer w0.5: 74HC595Sparkfun_4.19 118.9,148.6 29.2
Net30_1: 30.1 R30.2 | length 4
  Bottom Layer w0.5: R30.2 129.9,145.16 30.1
Net30_2: 30.2 74HC595Sparkfun_4.20 | length 47.9
  Bottom Layer w0.5: 74HC595Sparkfun_4.20 91,146.1 97.5,139.6 125.8,139.6 127.4,141.2 30.2
Net31_1: 31.1 R31.2 | length 3.9
  Bottom Layer w0.5: 31.1 135.1,145.14 R31.2
Net31_2: 31.2 74HC595Sparkfun_4.21 | length 53.1
  Bottom Layer w0.5: 74HC595Sparkfun_4.21 90,143.6 94.9,138.7 130.8,138.7 132.5,140.4 31.2
Net32_1: 32.1 R32.2 | length 3.8
  Bottom Layer w0.5: 32.1 140.2,145.14 R32.2
Net32_2: 32.2 74HC595Sparkfun_4.22 | length 58
  Bottom Layer w0.5: 74HC595Sparkfun_4.22 89.5,141.1 92.9,137.7 134.8,137.7 137.6,140.5 32.2
Net33_1: 33.1 R33.2 | length 4.4
  Bottom Layer w0.5: R33.2 124.84,122.24 33.1
Net33_2: 33.2 74HC595Sparkfun_5.15 | length 38.5
  Bottom Layer w0.5: 74HC595Sparkfun_5.15 118.9,121.3 33.2
Net34_1: 34.1 R34.2 | length 4.3
  Bottom Layer w0.5: 34.1 129.94,122.12 R34.2
Net34_2: 34.2 74HC595Sparkfun_5.16 | length 45.4
  Bottom Layer w0.5: 74HC595Sparkfun_5.16 117.5,118.8 120.9,115.4 126.2,115.4 127.4,116.6 34.2
Net35_1: 35.1 R35.2 | length 4.4
  Bottom Layer w0.5: R35.2 135.04,122.24 35.1
Net35_2: 35.2 74HC595Sparkfun_5.17 | length 51.2
  Bottom Layer w0.5: 74HC595Sparkfun_5.17 114.7,116.3 118.6,112.4 127,112.4 35.2
Net36_1: 36.1 R36.2 | length 4.3
  Bottom Layer w0.5: 36.1 140.14,122.12 R36.2
Net36_2: 36.2 74HC595Sparkfun_5.18 | length 56
  Bottom Layer w0.5: 74HC595Sparkfun_5.18 115.927,113.8 118.227,111.5 131.2,111.5 36.2
Net37_1: 37.1 R37.2 | length 4.5
  Bottom Layer w0.5: 37.1 124.8,108.94 R37.2
Net37_2: 37.2 74HC595Sparkfun_5.19 | length 38
  Bottom Layer w0.5: 74HC595Sparkfun_5.19 105.9,111.3 108.2,109 37.2
Net38_1: 38.1 R38.2 | length 4.5
  Bottom Layer w0.5: 38.1 129.9,108.94 R38.2
Net38_2: 38.2 74HC595Sparkfun_5.20 | length 51.5
  Bottom Layer w0.5: 74HC595Sparkfun_5.20 103.3,108.8 110.5,101.6 125.7,101.6 127.3,103.2 38.2
Net39_1: 39.1 R39.2 | length 4.4
  Bottom Layer w0.5: 39.1 135,108.94 R39.2
Net39_2: 39.2 74HC595Sparkfun_5.21 | length 56.8
  Bottom Layer w0.5: 74HC595Sparkfun_5.21 101.3,106.3 106.9,100.7 130.7,100.7 132.4,102.4 39.2
Net40_1: 40.1 R40.2 | length 4.4
  Bottom Layer w0.5: R40.2 140,108.96 40.1
Net40_2: 40.2 74HC595Sparkfun_5.22 | length 62.3
  Bottom Layer w0.5: 74HC595Sparkfun_5.22 102.333,103.8 106.333,99.8 136,99.8 137.5,101.3 40.2
Net41_1: 41.1 R41.2 | length 5.1
  Bottom Layer w0.5: R41.2 190.34,262.25 41.1
Net41_2: 41.2 74HC595Sparkfun_6.15 | length 33.8
  Bottom Layer w0.5: 74HC595Sparkfun_6.15 184.3,260.7 41.2
Net42_1: 42.1 R42.2 | length 5
  Bottom Layer w0.5: R42.2 195.44,262.15 42.1
Net42_2: 42.2 74HC595Sparkfun_6.16 | length 39.9
  Bottom Layer w0.5: 74HC595Sparkfun_6.16 182.3,258.2 185.7,254.8 190.5,254.8 42.2
Net43_1: 43.1 R43.2 | length 5.1
  Bottom Layer w0.5: 43.1 200.54,262.23 R43.2
Net43_2: 43.2 74HC595Sparkfun_6.17 | length 45.6
  Bottom Layer w0.5: 74HC595Sparkfun_6.17 181.9,255.7 184.8,252.8 193.6,252.8 43.2
Net44_1: 44.1 R44.2 | length 5
  Bottom Layer w0.5: 44.1 205.64,262.13 R44.2
Net44_2: 44.2 74HC595Sparkfun_6.18 | length 50.4
  Bottom Layer w0.5: 74HC595Sparkfun_6.18 183.127,253.2 184.427,251.9 197.8,251.9 44.2
Net45_1: 45.1 R45.2 | length 4.8
  Bottom Layer w0.5: 45.1 190.5,249.28 R45.2
Net45_2: 45.2 74HC595Sparkfun_6.19 | length 33
  Bottom Layer w0.5: 74HC595Sparkfun_6.19 186.54,250.7 45.2
Net46_1: 46.1 R46.2 | length 4.7
  Bottom Layer w0.5: 46.1 195.6,249.34 R46.2
Net46_2: 46.2 74HC595Sparkfun_6.20 | length 47.2
  Bottom Layer w0.5: 74HC595Sparkfun_6.20 162.8,248.2 169.5,241.5 191.2,241.5 192.8,243.1 192.8,249.2 46.2
Net47_1: 47.1 R47.2 | length 4.7
  Bottom Layer w0.5: 47.1 200.7,249.34 R47.2
Net47_2: 47.2 74HC595Sparkfun_6.21 | length 51.6
  Bottom Layer w0.5: 74HC595Sparkfun_6.21 162.2,245.7 167.3,240.6 194.7,240.6 198.1,244 47.2
Net48_1: 48.1 R48.2 | length 4.6
  Bottom Layer w0.5: 48.1 205.8,249.34 R48.2
Net48_2: 48.2 74HC595Sparkfun_6.22 | length 57.5
  Bottom Layer w0.5: 74HC595Sparkfun_6.22 161.3,243.2 164.8,239.7 200.8,239.7 203.2,242.1 48.2
Net49_1: 49.1 R49.2 | length 4.5
  Bottom Layer w0.5: R49.2 190.78,226.11 49.1
Net49_2: 49.2 74HC595Sparkfun_7.15 | length 36.9
  Bottom Layer w0.5: 74HC595Sparkfun_7.15 183.64,226.5 49.2
Net50_1: 50.1 R50.2 | length 4.3
  Bottom Layer w0.5: R50.2 195.94,226.15 50.1
Net50_2: 50.2 74HC595Sparkfun_7.16 | length 43.1
  Bottom Layer w0.5: 74HC595Sparkfun_7.16 182,224 186.5,219.5 191,219.5 50.2
Net51_1: 51.1 R51.2 | length 4.4
  Bottom Layer w0.5: R51.2 201.04,226.15 51.1
Net51_2: 51.2 74HC595Sparkfun_7.17 | length 48
  Bottom Layer w0.5: 74HC595Sparkfun_7.17 183.227,221.5 186.127,218.6 194.973,218.6 197.59,221.217 197.59,221.5 198.1,221.5 51.2
Net52_1: 52.1 R52.2 | length 4.4
  Bottom Layer w0.5: R52.2 206.14,226.25 52.1
Net52_2: 52.2 74HC595Sparkfun_7.18 | length 52.7
  Bottom Layer w0.5: 74HC595Sparkfun_7.18 184.454,219 185.754,217.7 199.4,217.7 52.2
Net53_1: 53.1 R53.2 | length 5.5
  Bottom Layer w0.5: 53.1 190.7,214.34 R53.2
Net53_2: 53.2 74HC595Sparkfun_7.19 | length 35.8
  Bottom Layer w0.5: 74HC595Sparkfun_7.19 186,216.5 53.2
Net54_1: 54.1 R54.2 | length 5.6
  Bottom Layer w0.5: 54.1 195.9,214.24 R54.2
Net54_2: 54.2 74HC595Sparkfun_7.20 | length 50.6
  Bottom Layer w0.5: 74HC595Sparkfun_7.20 171.1,214 179.5,205.6 190.4,205.6 193.2,208.4 54.2
Net55_1: 55.1 R55.2 | length 5.6
  Bottom Layer w0.5: 55.1 200.9,214.34 R55.2
Net55_2: 55.2 74HC595Sparkfun_7.21 | length 56.9
  Bottom Layer w0.5: 74HC595Sparkfun_7.21 172,211.5 179,204.5 196.6,204.5 198.3,206.2 55.2
Net56_1: 56.1 R56.2 | length 5.6
  Bottom Layer w0.5: 56.1 206.1,214.24 R56.2
Net56_2: 56.2 74HC595Sparkfun_7.22 | length 62.1
  Bottom Layer w0.5: 74HC595Sparkfun_7.22 170.7,209 176.1,203.6 201.5,203.6 203.4,205.5 56.2
Net57_1: 57.1 R57.2 | length 5.2
  Bottom Layer w0.5: 57.1 190.74,189.33 R57.2
Net57_2: 57.2 74HC595Sparkfun_8.15 | length 37.6
  Bottom Layer w0.5: 74HC595Sparkfun_8.15 181.2,191.2 57.2
Net58_1: 58.1 R58.2 | length 5.1
  Bottom Layer w0.5: 58.1 195.84,189.23 R58.2
Net58_2: 58.2 74HC595Sparkfun_8.16 | length 44.1
  Bottom Layer w0.5: 74HC595Sparkfun_8.16 182.427,188.7 186.3,184.827 186.3,183 186.75,182.55 191.423,182.55 193.073,184.2 58.2
Net59_1: 59.1 R59.2 | length 5.2
  Bottom Layer w0.5: 59.1 200.94,189.33 R59.2
Net59_2: 59.2 74HC595Sparkfun_8.17 | length 48
  Bottom Layer w0.5: 74HC595Sparkfun_8.17 178.4,186.2 183.1,181.5 195.7,181.5 59.2
Net60_1: 60.1 R60.2 | length 5.3
  Bottom Layer w0.5: 60.1 206.04,189.43 R60.2
Net60_2: 60.2 74HC595Sparkfun_8.18 | length 52.8
  Bottom Layer w0.5: 74HC595Sparkfun_8.18 179.627,183.7 182.727,180.6 199.9,180.6 60.2
Net61_1: 61.1 R61.2 | length 5.5
  Bottom Layer w0.5: 61.1 190.9,177.34 R61.2
Net61_2: 61.2 74HC595Sparkfun_8.19 | length 36.4
  Bottom Layer w0.5: 74HC595Sparkfun_8.19 178.2,181.2 182,177.4 61.2
Net62_1: 62.1 R62.2 | length 5.5
  Bottom Layer w0.5: R62.2 195.9,177.36 62.1
Net62_2: 62.2 74HC595Sparkfun_8.20 | length 51.1
  Bottom Layer w0.5: 74HC595Sparkfun_8.20 172.6,178.7 182.2,169.1 191.6,169.1 193.4,170.9 62.2
Net63_1: 63.1 R63.2 | length 5.6
  Bottom Layer w0.5: 63.1 201.1,177.34 R63.2
Net63_2: 63.2 74HC595Sparkfun_8.21 | length 57.8
  Bottom Layer w0.5: 74HC595Sparkfun_8.21 171.9,176.2 180.6,167.5 197.3,167.5 198.5,168.7 63.2
Net64_1: 64.1 R64.2 | length 5.4
  Bottom Layer w0.5: R64.2 206.1,177.36 64.1
Net64_2: 64.2 74HC595Sparkfun_8.22 | length 63
  Bottom Layer w0.5: 74HC595Sparkfun_8.22 171.6,173.7 179,166.3 201.5,166.3 203.6,168.4 64.2
Net65_1: 65.1 R65.2 | length 4.7
  Bottom Layer w0.5: 65.1 190.8,148.56 R65.2
Net65_2: 65.2 74HC595Sparkfun_9.15 | length 37
  Bottom Layer w0.5: 74HC595Sparkfun_9.15 181.5,155.2 65.2
Net66_1: 66.1 R66.2 | length 4.7
  Bottom Layer w0.5: 66.1 195.9,148.56 R66.2
Net66_2: 66.2 74HC595Sparkfun_9.16 | length 42.9
  Bottom Layer w0.5: 74HC595Sparkfun_9.16 178,152.7 184.5,146.2 191,146.2 66.2
Net67_1: 67.1 R67.2 | length 4.6
  Bottom Layer w0.5: R67.2 200.9,148.54 67.1
Net67_2: 67.2 74HC595Sparkfun_9.17 | length 47.8
  Bottom Layer w0.5: 74HC595Sparkfun_9.17 179.227,150.2 184.127,145.3 195.2,145.3 67.2
Net68_1: 68.1 R68.2 | length 4.6
  Bottom Layer w0.5: 68.1 206.04,152.83 R68.2
Net68_2: 68.2 74HC595Sparkfun_9.18 | length 52.6
  Bottom Layer w0.5: 74HC595Sparkfun_9.18 180.454,147.7 183.754,144.4 199.4,144.4 68.2
Net69_1: 69.1 R69.2 | length 5.6
  Bottom Layer w0.5: R69.2 190.9,141.26 69.1
Net69_2: 69.2 74HC595Sparkfun_9.19 | length 36
  Bottom Layer w0.5: 74HC595Sparkfun_9.19 179.4,145.2 183.3,141.3 69.2
Net70_1: 70.1 R70.2 | length 5.7
  Bottom Layer w0.5: 70.1 196.1,141.24 R70.2
Net70_2: 70.2 74HC595Sparkfun_9.20 | length 52
  Bottom Layer w0.5: 74HC595Sparkfun_9.20 173.3,142.7 183.9,132.1 191.6,132.1 193.5,134 70.2
Net71_1: 71.1 R71.2 | length 5.6
  Bottom Layer w0.5: R71.2 201.1,141.26 71.1
Net71_2: 71.2 74HC595Sparkfun_9.21 | length 57.3
  Bottom Layer w0.5: 74HC595Sparkfun_9.21 173.7,140.2 182.7,131.2 196.7,131.2 198.6,133.1 71.2
Net72_1: 72.1 R72.2 | length 5.6
  Bottom Layer w0.5: 72.1 206.3,141.24 R72.2
Net72_2: 72.2 74HC595Sparkfun_9.22 | length 62.6
  Bottom Layer w0.5: 74HC595Sparkfun_9.22 173.5,137.7 181.1,130.1 201.2,130.1 203.7,132.6 72.2
Net73_1: 73.1 R73.2 | length 4.8
  Bottom Layer w0.5: R73.2 189.94,115.65 73.1
Net73_2: 73.2 74HC595Sparkfun_10.15 | length 37.1
  Bottom Layer w0.5: 74HC595Sparkfun_10.15 178.7,119.6 73.2
Net74_1: 74.1 R74.2 | length 4.8
  Bottom Layer w0.5: 74.1 195.04,115.63 R74.2
Net74_2: 74.2 74HC595Sparkfun_10.16 | length 46.1
  Bottom Layer w0.5: 74HC595Sparkfun_10.16 158.9,117.1 171,105 186.6,105 74.2
Net74HC595Sparkfun_1_5: 74HC595Sparkfun_1.5 74HC595Sparkfun_2.5 74HC595Sparkfun_3.5 74HC595Sparkfun_4.5 74HC595Sparkfun_5.5 74HC595Sparkfun_6.5 74HC595Sparkfun_7.5 74HC595Sparkfun_8.5 74HC595Sparkfun_9.5 74HC595Sparkfun_10.5 Maître.D12 | length 1032.4
  Bottom Layer w0.5: Maître.D12 74.9,183.74 74.9,271.1 103,271.1 104.3,269.8 74HC595Sparkfun_1.5 104.3,267.1 101.4,264.2 91.106,264.2 90.356,264.95 88.177,264.95 86.75,263.523 86.75,243.644 93.244,237.15 101.95,237.15 103.3,235.8 74HC595Sparkfun_2.5 103.3,230.5 101.3,228.5 90.106,228.5 89.356,229.25 87.244,229.25 85.75,227.756 85.75,207.944 92.244,201.45 103.05,201.45 103.3,201.2 74HC595Sparkfun_3.5 103.3,196.2 101.6,194.5 90.006,194.5 89.356,195.15 87.244,195.15 85.75,193.656 85.75,173.844 92.244,167.35 101.7,167.35 101.9,167.15 74HC595Sparkfun_4.5 101.9,161.3 101.2,160.6 88.506,160.6 87.956,161.15 85.844,161.15 84.35,159.656 84.35,139.844 91.194,133 100.1,133 100.2,132.9 74HC595Sparkfun_5.5 100.2,124.55 99.5,123.85 97.444,123.85 96.894,123.3 89.873,123.3 89.323,123.85 84.144,123.85 82.65,122.356 82.65,102.544 89.144,96.05 101.704,96.05 104.554,93.2 207.146,93.2 210,96.054 210,265.246 206.786,268.46 194.841,268.46 194.751,268.55 172.95,268.55 74HC595Sparkfun_6.5 170.4,264.2 168.7,262.5 157.206,262.5 156.456,263.25 154.344,263.25 152.85,261.756 152.85,241.944 159.344,235.45 168.2,235.45 74HC595Sparkfun_7.5 168.2,230.032 166.468,228.3 155.006,228.3 154.256,229.05 152.144,229.05 150.65,227.556 150.65,207.744 157.144,201.25 167.55,201.25 168.5,200.3 74HC595Sparkfun_8.5 168.5,194.732 166.768,193 155.306,193 154.556,193.75 152.444,193.75 150.95,192.256 150.95,172.444 157.627,165.767 168.9,165.767 169,165.667 74HC595Sparkfun_9.5 169,158.9 167.1,157 155.806,157 155.056,157.75 152.944,157.75 152.31,157.117 151.977,157.117 151.45,156.59 151.45,136.644 153.667,134.427 153.667,129.894 154.194,129.367 168.8,129.367 168.9,129.267 74HC595Sparkfun_10.5
Net74HC595Sparkfun_1_6: 74HC595Sparkfun_1.6 74HC595Sparkfun_2.6 74HC595Sparkfun_3.6 74HC595Sparkfun_4.6 74HC595Sparkfun_5.6 74HC595Sparkfun_6.6 74HC595Sparkfun_7.6 74HC595Sparkfun_8.6 74HC595Sparkfun_9.6 74HC595Sparkfun_10.6 Maître.D8 | length 1064
  Bottom Layer w0.5: Maître.D8 61.3,195.22 61.3,269.1 64.2,272 105.8,272 106.8,271 74HC595Sparkfun_1.6 106.8,265.4 104.7,263.3 90.733,263.3 89.983,264.05 88.55,264.05 87.65,263.15 87.65,244.017 93.617,238.05 104.85,238.05 105.8,237.1 74HC595Sparkfun_2.6 105.8,229.9 103.5,227.6 89.733,227.6 88.983,228.35 87.617,228.35 86.65,227.383 86.65,208.317 92.617,202.35 105.7,202.35 105.8,202.25 74HC595Sparkfun_3.6 105.8,195.2 104.2,193.6 89.633,193.6 88.983,194.25 87.617,194.25 86.65,193.283 86.65,174.217 92.617,168.25 103.75,168.25 104.4,167.6 74HC595Sparkfun_4.6 104.4,161.2 102.9,159.7 88.133,159.7 87.583,160.25 86.217,160.25 85.25,159.283 85.25,140.217 91.567,133.9 102.7,133.9 74HC595Sparkfun_5.6 102.7,123.4 102.25,122.95 97.817,122.95 97.267,122.4 89.5,122.4 88.95,122.95 84.517,122.95 83.55,121.983 83.55,102.917 89.517,96.95 102.077,96.95 104.827,94.2 206.873,94.2 209.1,96.427 209.1,264.873 206.413,267.56 194.468,267.56 194.378,267.65 174.717,267.65 173.067,266 74HC595Sparkfun_6.6 172.9,263.9 170.6,261.6 156.833,261.6 156.083,262.35 154.717,262.35 153.75,261.383 153.75,242.317 159.717,236.35 170.317,236.35 170.7,235.967 74HC595Sparkfun_7.6 170.7,229.7 168.4,227.4 154.633,227.4 153.883,228.15 152.517,228.15 151.55,227.183 151.55,208.117 157.517,202.15 170.617,202.15 171,201.767 74HC595Sparkfun_8.6 171,193.8 169.3,192.1 154.933,192.1 154.183,192.85 152.817,192.85 151.85,191.883 151.85,172.817 158,166.667 171.5,166.667 74HC595Sparkfun_9.6 171.5,158.1 169.5,156.1 155.433,156.1 154.683,156.85 153.317,156.85 152.517,156.05 152.35,156.217 152.35,137.017 154.567,134.8 154.567,130.267 171.4,130.267 74HC595Sparkfun_10.6
Net74HC595Sparkfun_1_7: 74HC595Sparkfun_1.7 Maître.D11 | length 151.4
  Bottom Layer w0.5: Maître.D11 58.5,190.4 58.5,271.3 60.1,272.9 108.1,272.9 109.3,271.7 74HC595Sparkfun_1.7
Net74HC595Sparkfun_1_14: 74HC595Sparkfun_1.14 74HC595Sparkfun_2.7 | length 8.1
  Bottom Layer w0.5: 74HC595Sparkfun_2.7 109.3,233 74HC595Sparkfun_1.14
Net74HC595Sparkfun_2_14: 74HC595Sparkfun_2.14 74HC595Sparkfun_3.7 | length 6.1
  Bottom Layer w0.5: 74HC595Sparkfun_3.7 74HC595Sparkfun_2.14
Net74HC595Sparkfun_3_14: 74HC595Sparkfun_3.14 74HC595Sparkfun_4.7 | length 6.6
  Bottom Layer w0.5: 74HC595Sparkfun_4.7 108.3,165.3 74HC595Sparkfun_3.14
Net74HC595Sparkfun_4_14: 74HC595Sparkfun_4.14 74HC595Sparkfun_5.7 | length 10
  Bottom Layer w0.5: 74HC595Sparkfun_5.7 106.9,128.3 74HC595Sparkfun_4.14
Net74HC595Sparkfun_5_14: 74HC595Sparkfun_5.14 74HC595Sparkfun_6.7 | length 308.3
  Bottom Layer w0.5: 74HC595Sparkfun_5.14 105.2,95.1 206.5,95.1 208.2,96.8 208.2,264.5 206.7,266 74HC595Sparkfun_6.7
Net74HC595Sparkfun_6_14: 74HC595Sparkfun_6.14 74HC595Sparkfun_7.7 | length 7.1
  Bottom Layer w0.5: 74HC595Sparkfun_7.7 175.4,234 74HC595Sparkfun_6.14
Net74HC595Sparkfun_7_14: 74HC595Sparkfun_7.14 74HC595Sparkfun_8.7 | length 7.4
  Bottom Layer w0.5: 74HC595Sparkfun_7.14 173.2,196.8 74HC595Sparkfun_8.7
Net74HC595Sparkfun_8_14: 74HC595Sparkfun_8.14 74HC595Sparkfun_9.7 | length 8.2
  Bottom Layer w0.5: 74HC595Sparkfun_8.14 173.5,161 74HC595Sparkfun_9.7
Net74HC595Sparkfun_9_14: 74HC595Sparkfun_9.14 74HC595Sparkfun_10.7 | length 7.6
  Bottom Layer w0.5: 74HC595Sparkfun_10.7 174,125 74HC595Sparkfun_9.14
Net74HC595Sparkfun_10_17: 74HC595Sparkfun_10.17 75.2 | length 50.9
  Bottom Layer w0.5: 74HC595Sparkfun_10.17 159.2,114.6 169.7,104.1 190.8,104.1 75.2
Net75_1: 75.1 R75.2 | length 4.9
  Bottom Layer w0.5: 75.1 200.14,115.73 R75.2
"NetEsclave 1_1": "Esclave 1.1" "Esclave 2.1" "Esclave 3.1" Maître.A5 | length 51.3
  Bottom Layer w0.5: Maître.A5 26.14,214.99 26.14,234 26.14,246.8 26.1,246.84 26.1,258.3
"NetEsclave 1_2": "Esclave 1.2" "Esclave 2.2" "Esclave 3.2" Maître.A4 | length 57
  Bottom Layer w0.5: Maître.A4 15.4,211.91 15.4,213.4 23.6,221.6 23.6,234 23.6,246.8 23.56,246.84 23.56,258.3
VCC: 74HC595Sparkfun_1.1 74HC595Sparkfun_1.3 74HC595Sparkfun_2.1 74HC595Sparkfun_2.3 74HC595Sparkfun_3.1 74HC595Sparkfun_3.3 74HC595Sparkfun_4.1 74HC595Sparkfun_4.3 74HC595Sparkfun_5.1 74HC595Sparkfun_5.3 74HC595Sparkfun_6.1 74HC595Sparkfun_6.3 74HC595Sparkfun_7.1 74HC595Sparkfun_7.3 74HC595Sparkfun_8.1 74HC595Sparkfun_8.3 74HC595Sparkfun_9.1 74HC595Sparkfun_9.3 74HC595Sparkfun_10.1 74HC595Sparkfun_10.3 Maître.5V | length 718.8
  Top Layer w1: v1(82,95.5) 83.4,94.1 145.3,94.1 148.4,97.2 v1(148.4,107.2) ; 74HC595Sparkfun_5.1@89.9,126.3 74HC595Sparkfun_5.1 ; 74HC595Sparkfun_4.1@91.7,164.1 74HC595Sparkfun_4.1 ; 74HC595Sparkfun_2.1@93,232.3 74HC595Sparkfun_2.1 ; 74HC595Sparkfun_1.3 74HC595Sparkfun_1.3@99.5,267.9 ; 74HC595Sparkfun_9.1@158.9,160.6 74HC595Sparkfun_9.1 ; 74HC595Sparkfun_7.3@163.1,231.9 74HC595Sparkfun_7.3
  Bottom Layer w1: Maître.5V 29.55,183.95 30.1,183.4 30.1,149.3 79.9,149.3 ; v1(82,95.5) 79.9,97.6 79.9,126.6 ; 74HC595Sparkfun_5.3 95.3,126.7 95.3,130.3 90.2,130.3 74HC595Sparkfun_5.1 90.1,126.7 90,126.6 79.9,126.6 ; 74HC595Sparkfun_4.3 96.9,164.087 95.187,165.8 92.2,165.8 91.9,165.5 74HC595Sparkfun_4.1 79.9,163.9 ; 74HC595Sparkfun_3.3 98.3,199.7 98.1,199.9 93.3,199.9 74HC595Sparkfun_3.1 80,197.9 79.9,198 ; 74HC595Sparkfun_2.3 98.3,234.5 93.3,234.5 74HC595Sparkfun_2.1 80,232 79.9,231.9 ; 74HC595Sparkfun_1.3 98.7,267.7 98.7,268.487 97.587,269.6 94.9,269.6 94.9,267.7 74HC595Sparkfun_1.1 94,268 79.9,268 79.9,231.9 ; v1(148.4,107.2) 148.4,124.9 ; 74HC595Sparkfun_7.3 163.2,233.9 163.1,234 158.2,234 74HC595Sparkfun_7.1 148.4,231.8 ; 74HC595Sparkfun_8.3 163.5,198.8 158.5,198.8 74HC595Sparkfun_8.1 148.5,196.5 148.4,196.4 ; 74HC595Sparkfun_10.3 164,125 164,127.2 158.9,127.2 74HC595Sparkfun_10.1 148.4,124.9 ; 74HC595Sparkfun_9.3 164,163 159,163 74HC595Sparkfun_9.1 148.4,160.5 ; 74HC595Sparkfun_6.3 165.4,268.1 165.3,268.2 160.4,268.2 74HC595Sparkfun_6.1 159.8,266.6 148.4,266.6 148.4,231.8 ; 79.9,126.6 79.9,149.3 ; 79.9,149.3 79.9,163.9 ; 79.9,163.9 79.9,198 ; 79.9,198 79.9,231.9 ; 148.4,124.9 148.4,160.5 ; 148.4,160.5 148.4,196.4 ; 148.4,196.4 148.4,231.8
pads on no net: 74HC595Sparkfun_1.8 74HC595Sparkfun_1.9 74HC595Sparkfun_1.10 74HC595Sparkfun_1.11 74HC595Sparkfun_1.12 74HC595Sparkfun_1.13 74HC595Sparkfun_2.8 74HC595Sparkfun_2.9 74HC595Sparkfun_2.10 74HC595Sparkfun_2.11 74HC595Sparkfun_2.12 74HC595Sparkfun_2.13 74HC595Sparkfun_3.8 74HC595Sparkfun_3.9 74HC595Sparkfun_3.10 74HC595Sparkfun_3.11 74HC595Sparkfun_3.12 74HC595Sparkfun_3.13 74HC595Sparkfun_4.8 74HC595Sparkfun_4.9 74HC595Sparkfun_4.10 74HC595Sparkfun_4.11 74HC595Sparkfun_4.12 74HC595Sparkfun_4.13 74HC595Sparkfun_5.8 74HC595Sparkfun_5.9 74HC595Sparkfun_5.10 74HC595Sparkfun_5.11 74HC595Sparkfun_5.12 74HC595Sparkfun_5.13 74HC595Sparkfun_6.8 74HC595Sparkfun_6.9 74HC595Sparkfun_6.10 74HC595Sparkfun_6.11 74HC595Sparkfun_6.12 74HC595Sparkfun_6.13 74HC595Sparkfun_7.8 74HC595Sparkfun_7.9 74HC595Sparkfun_7.10 74HC595Sparkfun_7.11 74HC595Sparkfun_7.12 74HC595Sparkfun_7.13 74HC595Sparkfun_8.8 74HC595Sparkfun_8.9 74HC595Sparkfun_8.10 74HC595Sparkfun_8.11 74HC595Sparkfun_8.12 74HC595Sparkfun_8.13 74HC595Sparkfun_9.8 74HC595Sparkfun_9.9 74HC595Sparkfun_9.10 74HC595Sparkfun_9.11 74HC595Sparkfun_9.12 74HC595Sparkfun_9.13 74HC595Sparkfun_10.8 74HC595Sparkfun_10.9 74HC595Sparkfun_10.10 74HC595Sparkfun_10.11 74HC595Sparkfun_10.12 74HC595Sparkfun_10.13 74HC595Sparkfun_10.14 74HC595Sparkfun_10.18 74HC595Sparkfun_10.19 74HC595Sparkfun_10.20 74HC595Sparkfun_10.21 74HC595Sparkfun_10.22 Maître.3.3V Maître.A0 Maître.A1 Maître.A2 Maître.A3 Maître.AREF Maître.D2 Maître.D3 Maître.D4 Maître.D5 Maître.D6 Maître.D7 Maître.D9 Maître.D10 Maître.D13 Maître.GND@1 Maître.GND@2 Maître.IOREF Maître.NC Maître.RES Maître.RX Maître.SCL Maître.SDA Maître.TX Maître.VIN

## Polygon pours and split planes (outlines as drawn)
GND on Bottom Layer "Bottom Layer-No Net" (solid, pour order 0): 12.1,273.2 12.2,273.1 282.1,273.1 282.1,92.8 282,92.9 12,92.9 12,273.1 12.1,273.2
GND on Top Layer "Bottom Layer-No Net" (solid, pour order 4): 11.9,273.3 12,273.2 282,273.2 282,93.3 282.5,92.8 282.2,92.5 12,92.5 12,272.5 11.5,273

## Silkscreen, mask and mechanical layers (free items; w line width, h text height)
Mechanical 1:
  the board outline again, w0.254

## Text inside footprints (layer, text, board x,y; h text height)
Maître: Mechanical 16 "ISP" at 46.408,210.366 h0.43; Mechanical 16 "RST" at 43.995,207.191 h0.43; Bottom Overlay "IOREF" at 21.884,176.838 h0.86 r180; Bottom Overlay "SCL" at 67.49,164.392 h0.86; Bottom Overlay "SDA" at 67.49,166.932 h0.86; Bottom Overlay "RX" at 67.49,208.842 h0.86; Bottom Overlay "TX" at 67.49,206.302 h0.86; Bottom Overlay "2" at 67.49,203.762 h0.86; Bottom Overlay "3" at 67.49,201.222 h0.86; Bottom Overlay "4" at 67.49,198.682 h0.86; Bottom Overlay "5" at 67.49,196.142 h0.86; Bottom Overlay "6" at 67.49,193.602 h0.86; Bottom Overlay "7" at 67.49,191.062 h0.86; Bottom Overlay "8" at 67.49,187.252 h0.86; Bottom Overlay "9" at 67.49,184.712 h0.86; Bottom Overlay "10" at 67.49,182.172 h0.86; Bottom Overlay "AREF" at 67.49,169.472 h0.86; Bottom Overlay "11" at 67.49,179.632 h0.86; Bottom Overlay "12" at 67.49,177.092 h0.86; Bottom Overlay "13" at 67.49,174.552 h0.86; Bottom Overlay "GND" at 67.49,172.012 h0.86; Bottom Overlay "5" at 21.884,209.858 h0.86 r180; Bottom Overlay "4" at 21.884,207.318 h0.86 r180; Bottom Overlay "3" at 21.884,204.778 h0.86 r180; Bottom Overlay "2" at 21.884,202.238 h0.86 r180; Bottom Overlay "1" at 21.884,199.698 h0.86 r180; Bottom Overlay "0" at 21.884,197.158 h0.86 r180; Bottom Overlay "+3.3V" at 21.884,181.918 h0.86 r180; Bottom Overlay "VIN" at 21.884,192.078 h0.86 r180; Bottom Overlay "RST" at 21.884,179.378 h0.86 r180; Bottom Overlay "+5V" at 21.884,184.458 h0.86 r180; Bottom Overlay "GND" at 21.884,189.538 h0.86 r180; Bottom Overlay "GND" at 21.884,186.998 h0.86 r180